# Altium PCB PCB_V2_SingleSwitch.PcbDoc
Units mil, origin at the board's own origin, x right, y up, seen from the top; angles counter-clockwise.
Board outline 1889.76 x 1889.76 mil, 2 copper layers (Top Layer, Bottom Layer); 8 components, 19 nets, 59 pads, 1 vias.
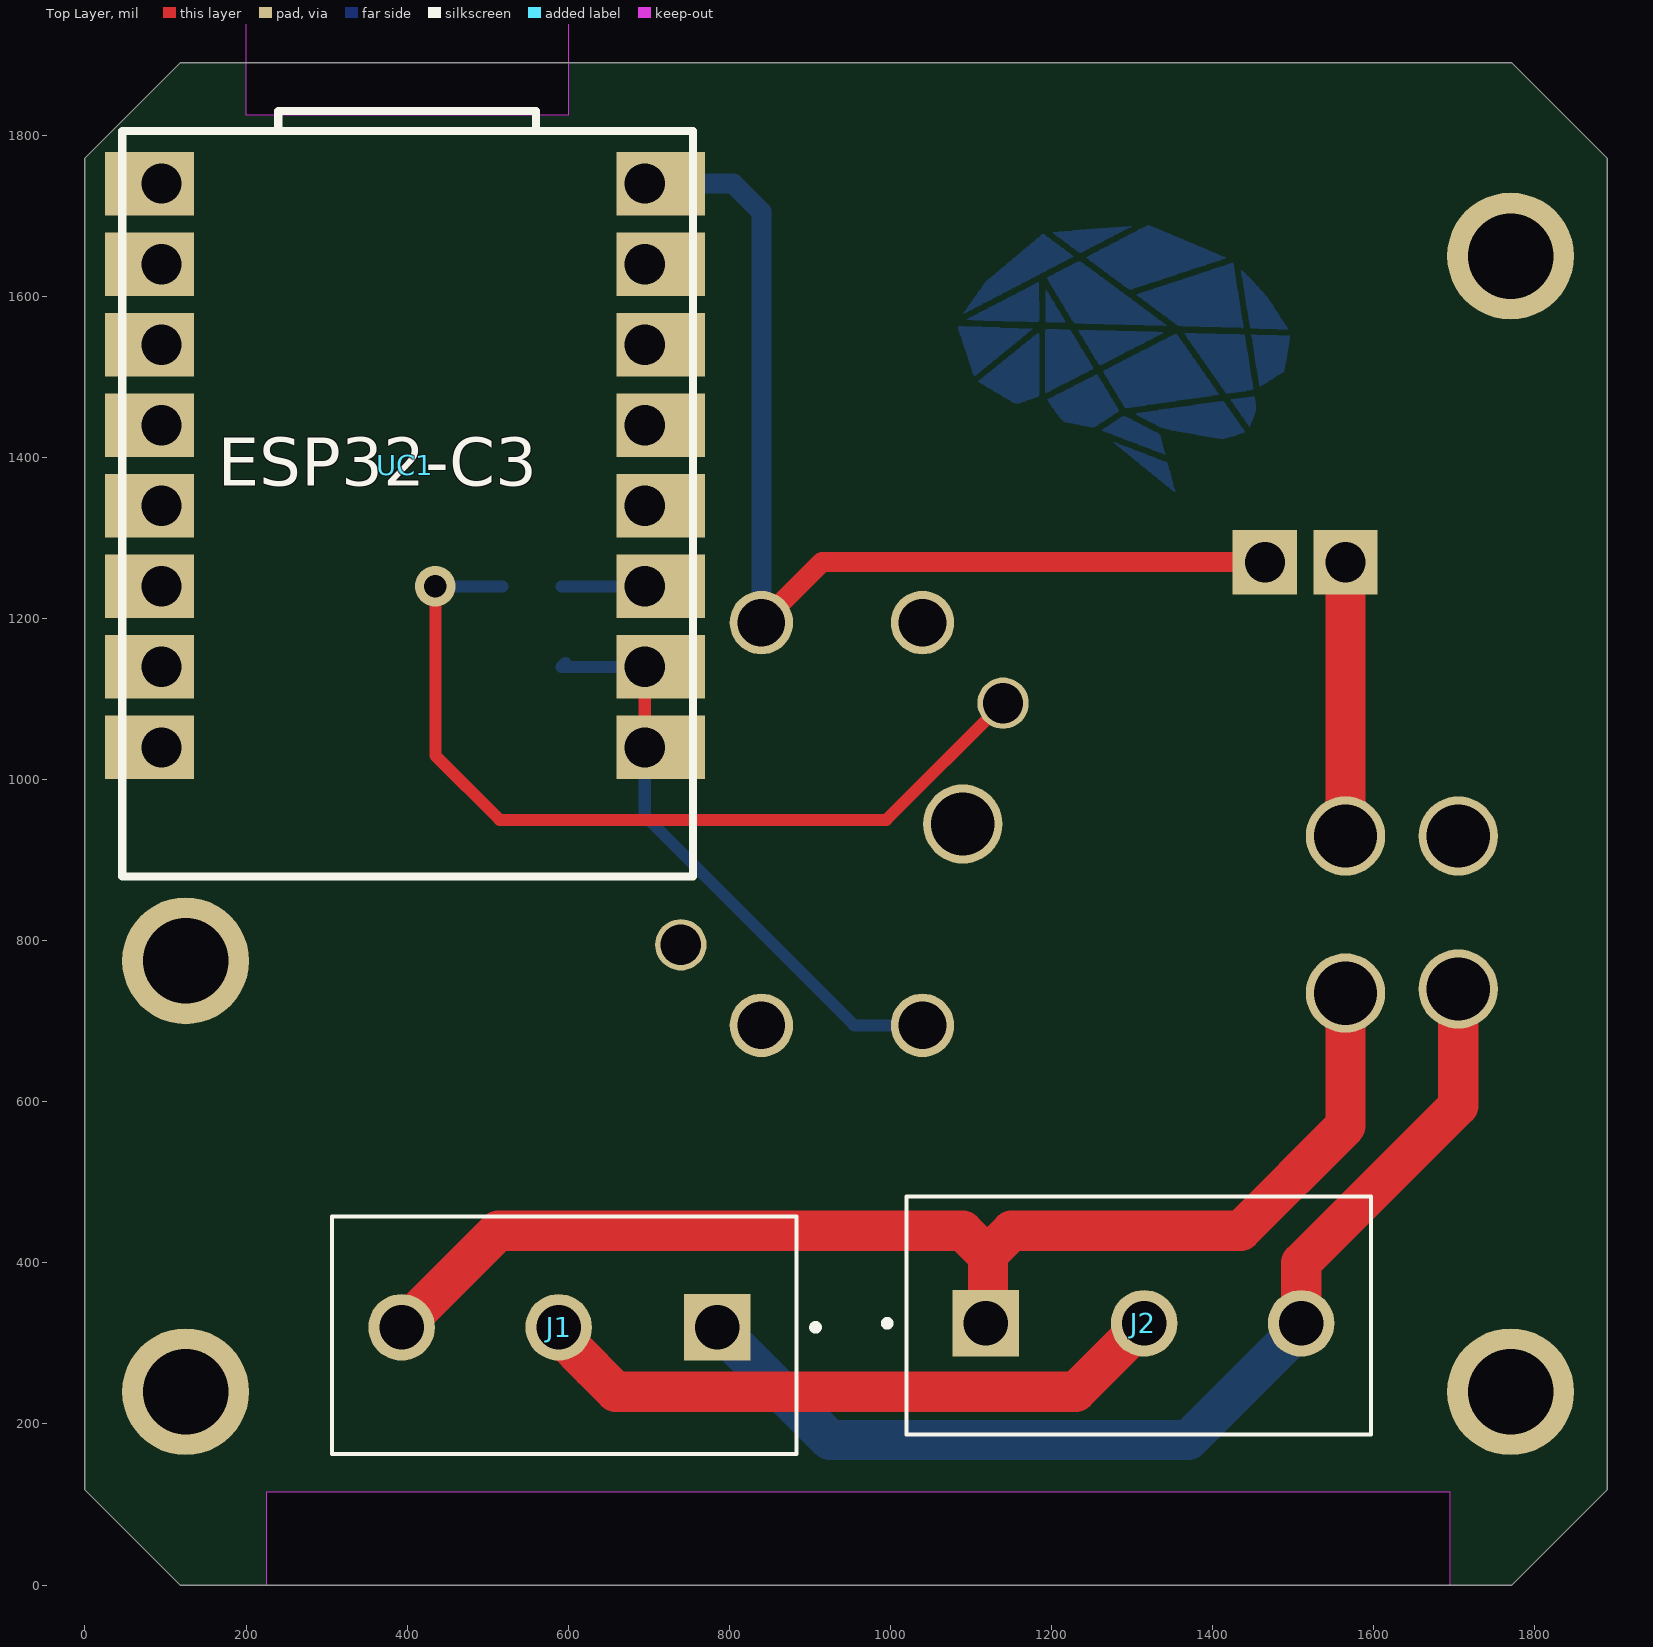
[diagram p0: Top Layer view]
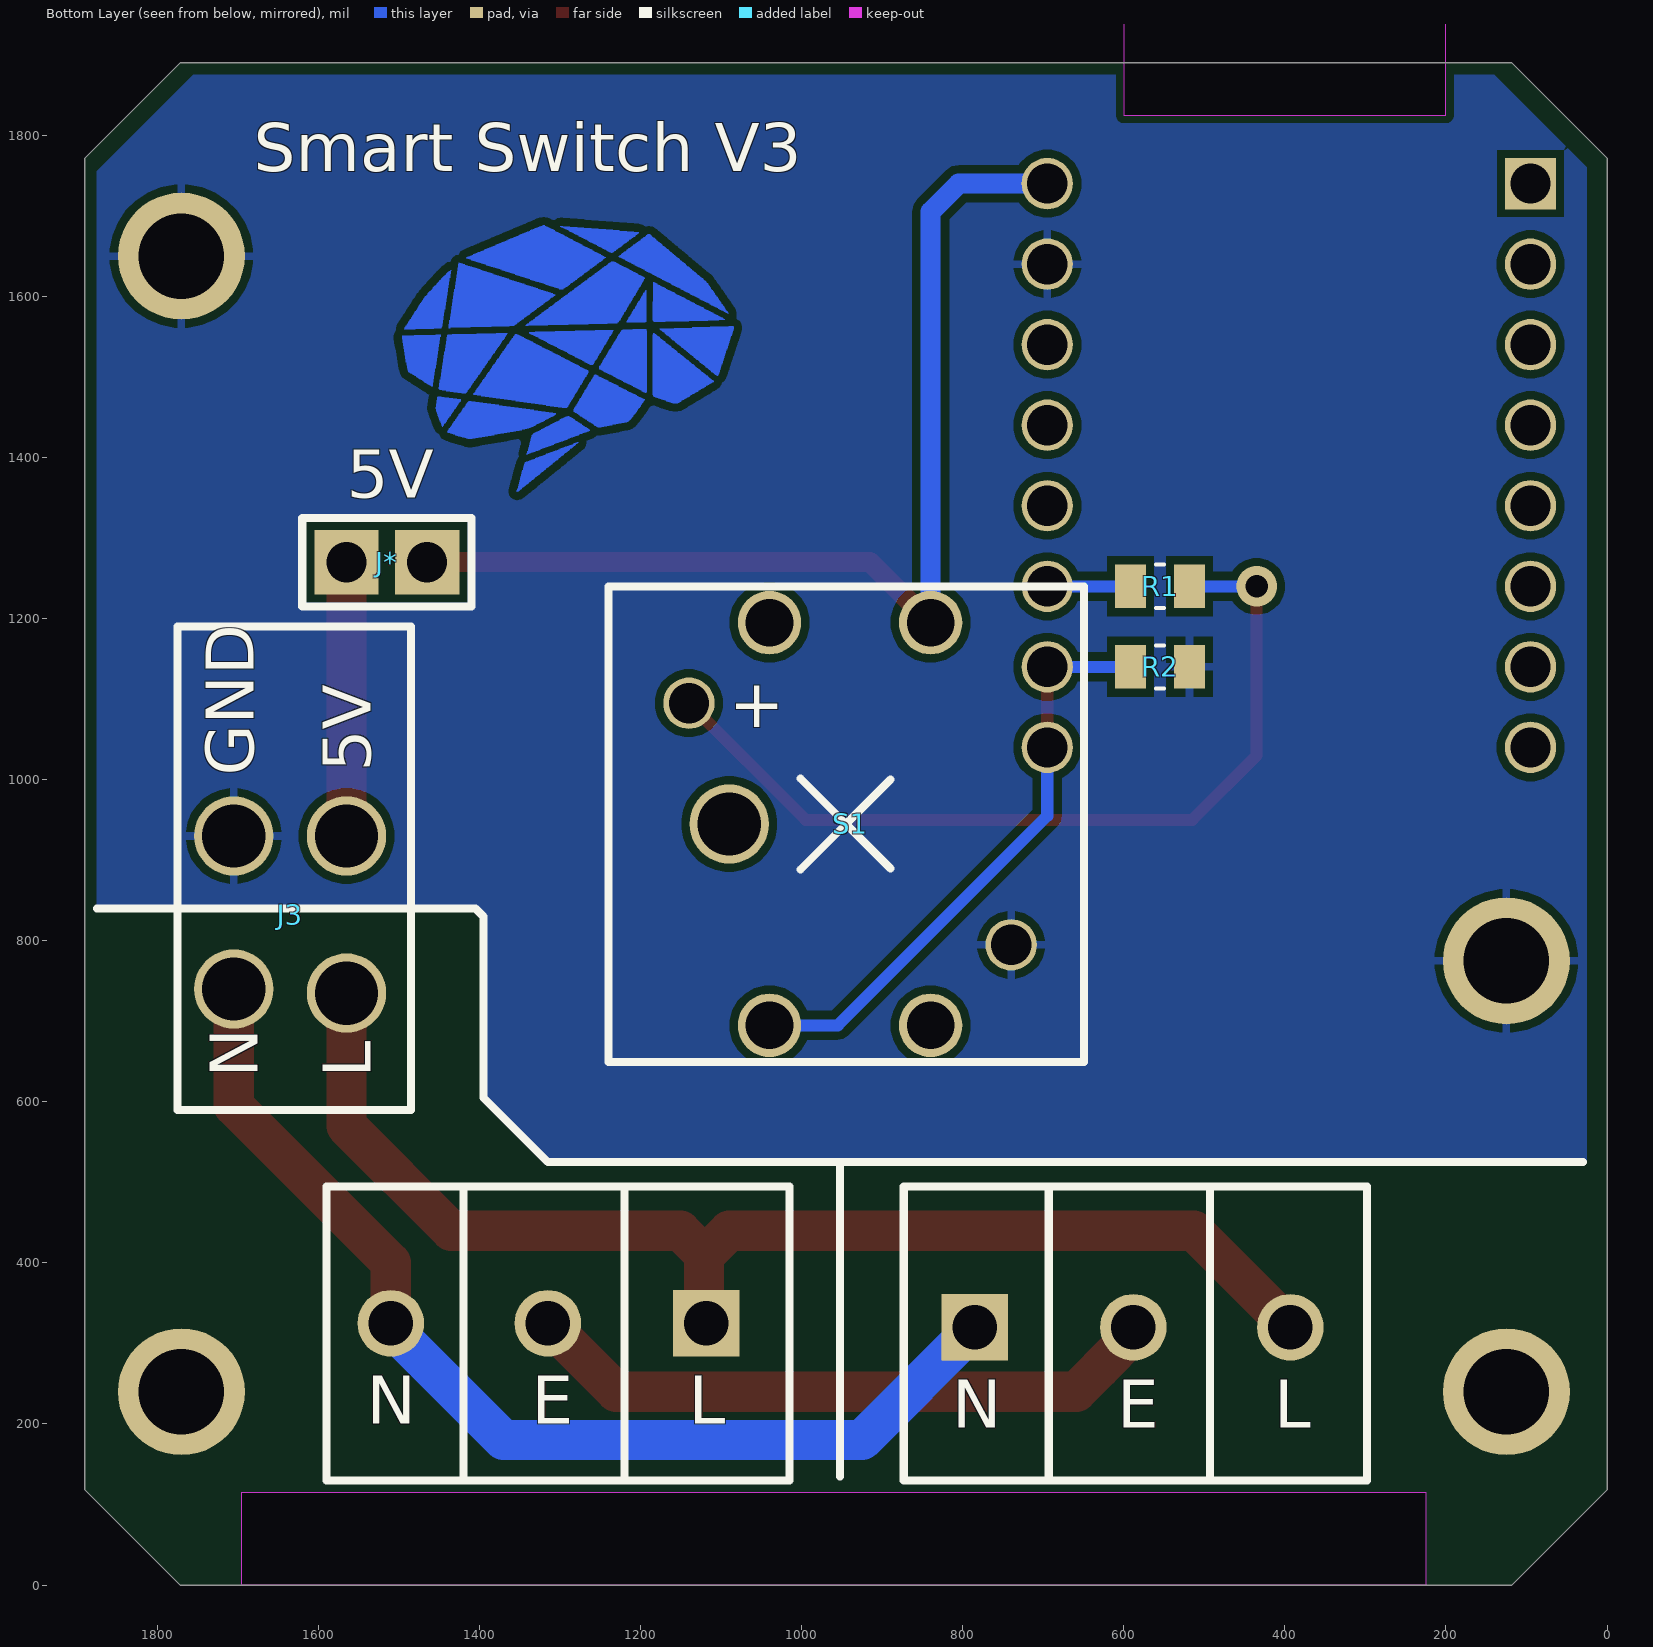
[diagram p1: Bottom Layer view, seen from below]

## Layer stack, top to bottom
Top Solder: solder mask 0.4, Solder Resist, Dk 3.5
Top Layer: signal copper 1.4
Dielectric 1: dielectric 12.6, FR-4, Dk 4.8
Bottom Layer: signal copper 1.4
Bottom Solder: solder mask 0.4, Solder Resist, Dk 3.5

## Board outline
0,118.11 0,1771.65 118.11,1889.76 1771.65,1889.76 1889.76,1771.65 1889.76,118.11 1771.65,0 118.11,0
cut-out: 1695,115 225,115 225,0 1695,0
cut-out: 600,1980 600,1825 240,1825 220,1825 200,1825 200,1980 545,1980

## Design rules (kind name [scope] priority, off if disabled: settings)
Clearance Clearance_1 [OnMid vs OnMid] p1: gap=10 ignorepadtopadclearanceinfootprint=FALSE sourcerule=37 cellrowname=All cellrowtype=0 cellcolname=All cellcoltype=0 innerlayers=TRUE
Clearance Clearance_2 [(ExistsOnLayer('Top Layer') Or ExistsOnLayer('Bottom Layer')) vs (ExistsOnLayer('Top Layer') Or ExistsOnLayer('Bottom Layer'))] p2: gap=10 ignorepadtopadclearanceinfootprint=FALSE sourcerule=37 cellrowname=All cellrowtype=0 cellcolname=All cellcoltype=0 outerlayers=TRUE
Clearance [All] p3: gap=10 ignorepadtopadclearanceinfootprint=FALSE ismatrix=TRUE
PolygonConnect [All] p1: connectstyle=Relief reliefconductorwidth=10 reliefentries=4 polygonreliefangle="90 Angle" airgapwidth=10
RoutingVias [All] p1: holewidth=28 width=50 viastyle="Through Hole" minholewidth=28 minwidth=50 maxholewidth=28 maxwidth=50
SolderMaskExpansion [All] p1: expansion=4 istentingtop=FALSE
Width MaxMinWidth_1 [All] p1: maxlimit=50 minlimit=10 preferedwidth=20 minimp=50.000000 maximp=50.000000 favimp=50.000000
Width Width_1 [All] p2: maxlimit=10 minlimit=10 preferedwidth=10
30 further rules are at their usual default settings.

## Classes and differential pairs
component class U_Switch: R1 R2 S1
component class U_ESP32: UC1
component class Top: J1 J2 J3 J*

## Components (designator, comment, footprint, x,y, rotation, side; value= is the part's Value field where it differs from the comment)
J1 "Off Board Connector 3Pin" "OFF BORAD CONNECTOR 3PIN" 586.57,320 r180 top
J2 "Off Board Connector 3Pin" "OFF BORAD CONNECTOR 3PIN" 1316.57,325 r0 top
J3 "5VPowerBlock" 5VPowerBlock 1620,790 r90 bottom
J* "2Pin Jumper Connectror" "2Pin Jumper" 1465,1270 r0 bottom
R1 "SMD Resistor" "SMD Resistor" 555,1240 r180 bottom
R2 "SMD Resistor" "SMD Resistor" 555,1140 r180 bottom
S1 "Honyone TS Series" "Honyone TS Series" 944.88,944.88 r180 bottom
UC1 "ESP32_C3_Super_Mini" ESP32_C3_Super_Mini 395,1340 r0 top

## Footprints (in the part's own frame and the unit in brackets; to place one, negate y for a bottom-side part, rotate by r counter-clockwise, add the part's x,y. Pads: shape width x height; smd on the part's side, far side on the other; paste and mask are expansions set on the pad)
"2Pin Jumper" [mil]
  rect 80x80 hole 50: 1(0,0) 2(100,0)
  silkscreen extent -55,-55 155,55
5VPowerBlock [mm]
  round 2.5 hole 2: 1(-1.27,2.159) 2(-1.397,-1.397) 3(3.556,-1.397) 4(3.556,2.159)
  silkscreen extent -5.08,-3.43 10.16,3.94
ESP32_C3_Super_Mini [mm]
  round 1.62 hole 1.27: 1(7.62,10.16) 2(7.62,7.62) 3(7.62,5.08) 4(7.62,-7.62) 5(7.62,-5.08) 6(7.62,-2.54) 7(7.62,0) 8(7.62,2.54) 10(-7.62,7.62) 11(-7.62,5.08) 12(-7.62,2.54) 13(-7.62,0) 14(-7.62,-2.54) 15(-7.62,-5.08) 16(-7.62,-7.62)
  rect 2.8x2 smd: 1(8.128,10.16) 2(8.128,7.62) 3(8.128,5.08) 4(8.128,-7.62) 5(8.128,-5.08) 6(8.128,-2.54) 7(8.128,0) 8(8.128,2.54) 9(-8.001,10.16) 10(-8.001,7.62) 11(-8.001,5.08) 12(-8.001,2.54) 13(-8.001,0) 14(-8.001,-2.54) 15(-8.001,-5.08) 16(-8.001,-7.62)
  rect 1.62x1.62 hole 1.27: 9(-7.62,10.16)
  silkscreen extent -8.86,-11.69 9.14,12.45, body extent -8.89,-11.24 8.91,12.76, height 4.3
"Honyone TS Series" [mm]
  round 2 hole 1.5: 1(-2.413,6.35) 2(2.667,6.35) 3(-2.413,-6.35) 4(2.667,-6.35)
  round 1.62 hole 1.27: A(-4.953,3.81) K(5.207,-3.81)
  round 2.5 hole 2: NC(-3.683,0)
  silkscreen extent -7.49,-7.51 7.51,7.49, body extent -7.38,-7.5 7.62,7.5, height 13.5
"OFF BORAD CONNECTOR 3PIN" [mm]
  rect 2.1x2.1 hole 1.4: 1(-5.04,0)
  round 2.1 hole 1.4: 2(-0.04,0) 3(4.913,0)
  silkscreen extent -8.24,-3.5 7.11,4, body extent -8.3,-4.32 7.54,3.88, height 10.3
"SMD Resistor" [mm]
  rect 0.97x1.38 smd: 1(-0.93,0) 2(0.93,0)
  silkscreen extent -0.12,-0.68 0.12,0.68, body extent -0.98,-0.63 1.02,0.63, height 0.6

## Part data
J1 J2: library part CMP-007-000001-2, "Screw Connector", Design Item ID="Off Board Connector 3Pin", Source=Basic.SchLib
J3: library part CMP-012-000011-1, Design Item ID=5VPowerBlock, Source=Basic.SchLib
J*: library part CMP-007-000002-1
R1 R2: library part CMP-009-000002-1, Design Item ID="SMD Resistor", Source=Basic.SchLib
S1: library part CMP-012-000009-3, Design Item ID="Honyone TS Series", Source=Basic.SchLib
UC1: library part CMP-003-000012-3, Design Item ID=ESP32_C3_Super_Mini, Source=Components.SchLib

## Free pads (board coordinates)
  round 157.48 hole 106.3: 2(125,240) 2(125,775) 2(1770,240) 2(1770,1650)

## Via types
v1: diameter 50, hole 28, Top Layer to Bottom Layer, 1 vias

## Nets (pads, with @x,y where several pads share a name; then routed paths per layer and width w, separated by ;. In a path a pad name is that pad's centre, name@x,y a point inside that pad or via, vN(x,y) a via of type N, cw(c..) or ccw(c..) an arc to the next point about the centre after c; other vN are vias at no path point)
+5: J*.1 S1.2 UC1.1 | length 1325.8
  Top Layer w25: S1.2 915,1270 J*.1
  Bottom Layer w25: UC1.1@695,1740 805,1740 839.88,1705.12 S1.2
GND: J3.4 pad.2@125,775 pad.2@1770,1650 R2.2 S1.K UC1.2
NetJ1_1: J1.1 J2.3 J3.1 | length 1341.8
  Top Layer w50: J2.3 1510,400 1705,595 J3.1
  Bottom Layer w50: J1.1 925,180 1370,180 1510,320 J2.3
NetJ1_2: J1.2 J2.2 | length 800.5
  Top Layer w50: J1.2 588.15,311.16 629.76,269.55 629.76,269.29 659.05,240 1230,240 J2.2
NetJ1_3: J1.3 J2.1 J3.2 | length 1547.8
  Top Layer w50: J1.3 513.15,440 1090,440 1117.95,412.05 ; J2.1 1121.18,328.03 1121.18,410.71 1150.47,440 1435,440 1565,570 J3.2
NetJ3_3: J3.3 J*.2 | length 340
  Top Layer w50: J3.3 J*.2
NetR1_1: R1.1 UC1.6 | length 103.4
  Bottom Layer w15: R1.1 UC1.6@695,1240
NetR1_2: R1.2 S1.A | length 1091.4
  Top Layer w15: v1(435,1240) 435,1030 515,950 995,950 S1.A
  Bottom Layer w15: v1(435,1240) R1.2
NetR2_1: R2.1 S1.3 UC1.4 UC1.5 | length 748.1
  Top Layer w15: UC1.4@695,1040 UC1.5@695,1140
  Bottom Layer w15: R2.1@596.61,1145 R2.1 UC1.5@695,1140 ; UC1.4@695,1040 695,955 955.12,694.88 S1.3
NetUC1_7: UC1.7
NetUC1_8: UC1.8
NetUC1_9: UC1.9
NetUC1_10: UC1.10
NetUC1_11: UC1.11
NetUC1_12: UC1.12
NetUC1_13: UC1.13
NetUC1_14: UC1.14
NetUC1_15: UC1.15
NetUC1_16: UC1.16
pads on no net: S1.1 S1.4 S1.NC UC1.3

## Polygon pours and split planes (outlines as drawn)
GND on Bottom Layer "GND_L02_P000" (solid, remove dead copper, pour order 0): 140,1875 25,1760 25,525 1315,525 1395,605 1395,830 1405,840 1875,840 1875,1755 1755,1875

## Other copper
Bottom Layer:
  drawing of 22 lines, arcs and shapes, not listed

## Silkscreen, mask and mechanical layers (free items; w line width, h text height)
Bottom Overlay:
  lines w10: 30,525 1315,525 1395,605 1395,830 1405,840 1875,840 ; 493.15,130 493.15,495 ; 693.15,130 693.15,495 ; 952.5,135 952.5,525 ; 1220,130 1220,495 ; 1420,130 1420,495 ; 298.15,130 873.15,130 873.15,495 298.15,495 298.15,130 ; 1015,130 1590,130 1590,495 1015,495 1015,130
  text "Smart Switch V3" at 1680,1755 h60
  text "5V" at 1565,1350 h60
  text "L" at 1140,200.02 h60
  text "E" at 1335,200.02 h60
  text "N" at 1540,200.02 h60
  text "L" at 413.15,195.02 h60
  text "E" at 608.15,195.02 h60
  text "N" at 813.15,195.02 h60

## Text inside footprints (layer, text, board x,y; h text height)
J3: Bottom Overlay "L" at 1535,630 h60 r270; Bottom Overlay "N" at 1675,630 h60 r270; Bottom Overlay "5V" at 1535,1010 h60 r270; Bottom Overlay "GND" at 1680,1005 h60 r270
S1: Bottom Overlay "+" at 1089.88,1064.89 h60
UC1: Top Overlay "ESP32-C3" at 165,1365 h60